# EAGLE board 5VAC-DC (EAGLE 9.6.2)
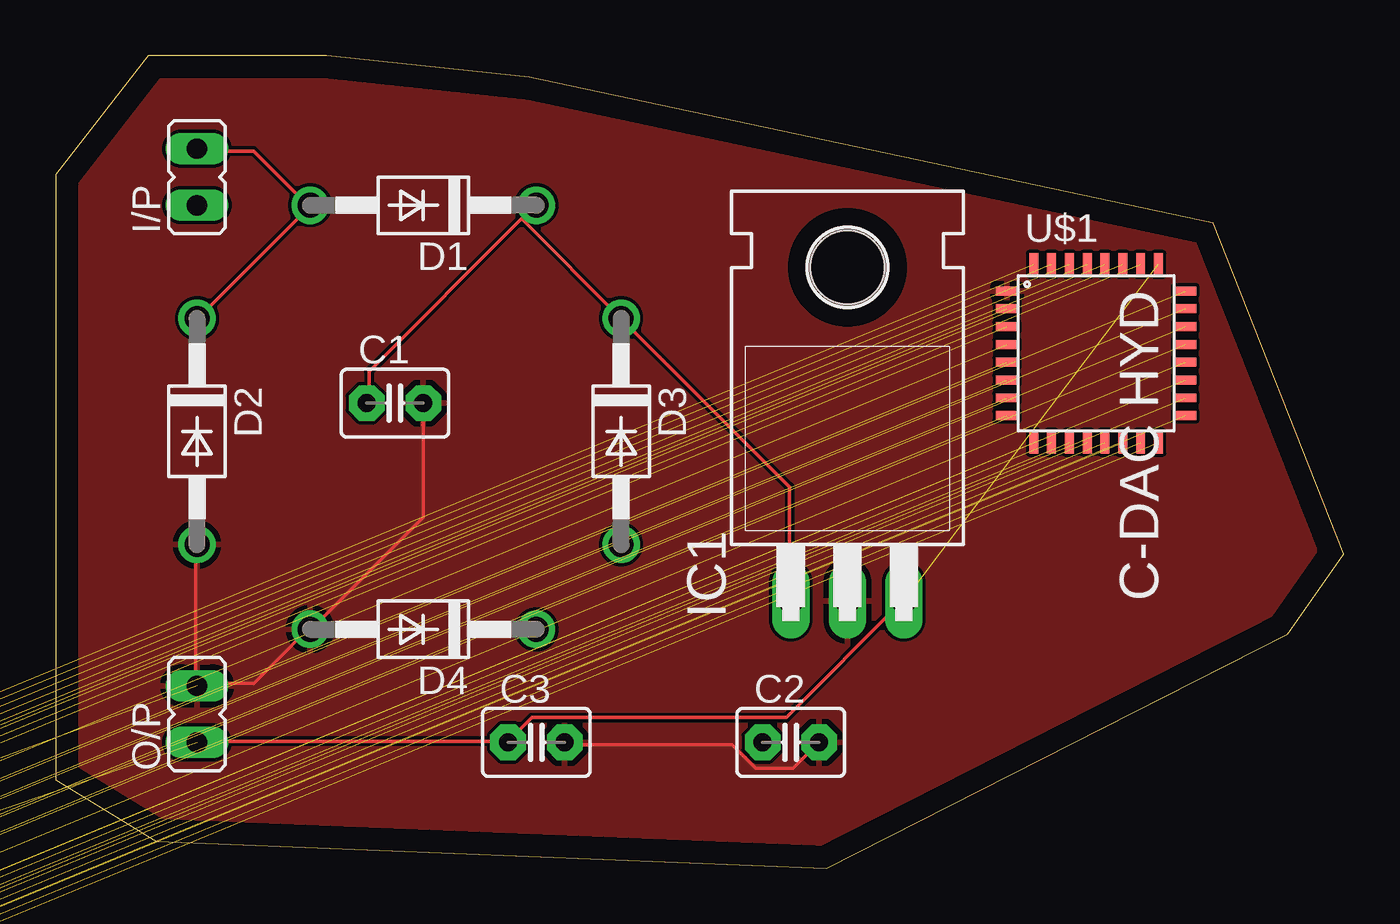
[diagram p0: board, top side]
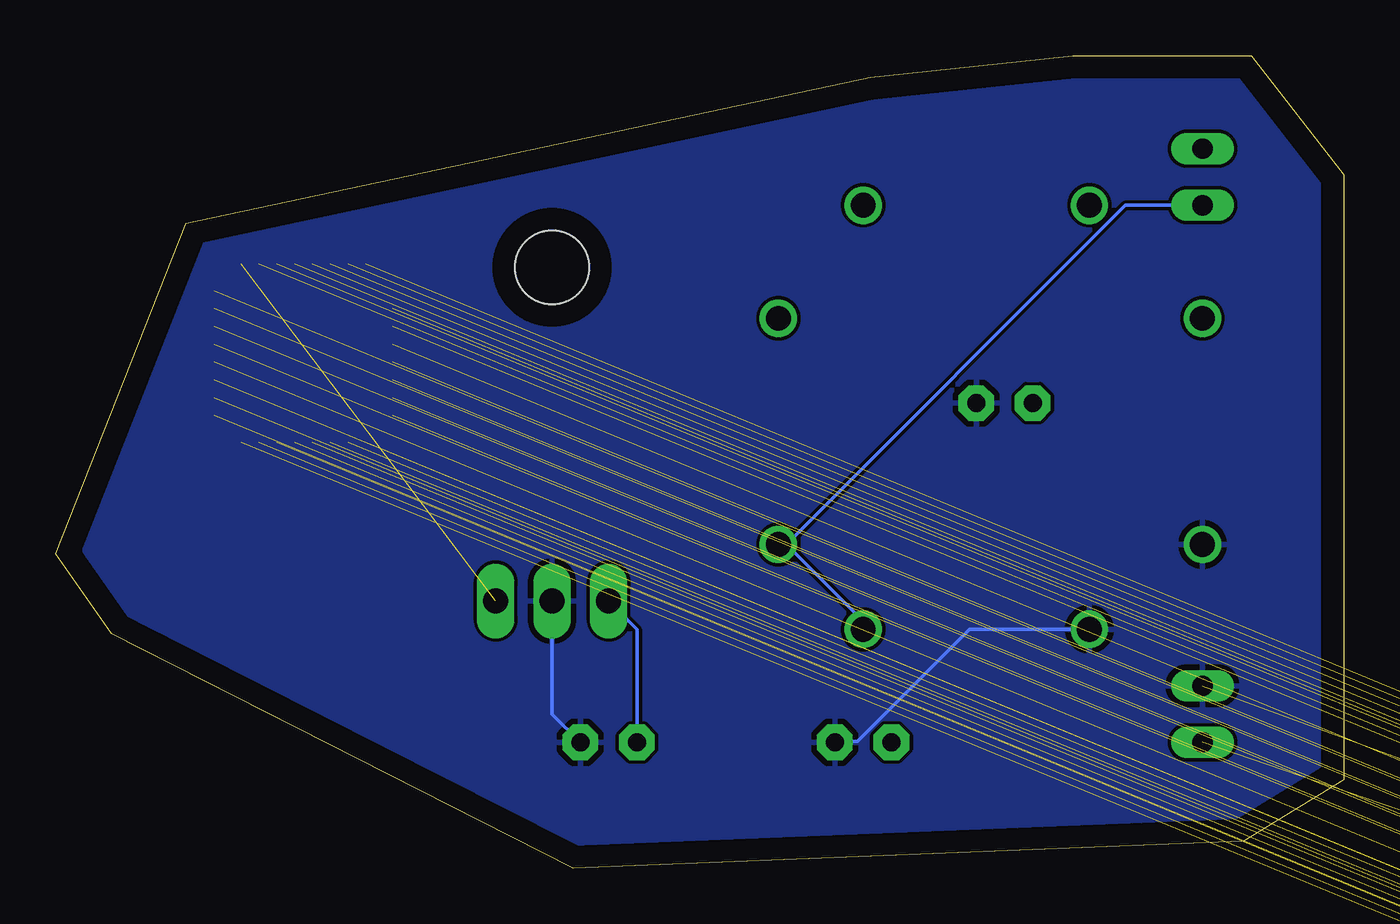
[diagram p1: board, bottom side, seen from below]

Size 57.86 x 36.51 mm. Coordinates in mm from the lower left corner, seen from the top.
Outline: 0,31.15 0,3.98 4.51,1.21 34.62,0 55.35,10.53 57.86,14.13 51.99,28.99 21.27,35.55 12.18,36.51 4.16,36.51 0,31.15
Copper layers (1*16): Top 0.035mm / dielectric 1.5mm / Bottom 0.035mm
Design rules "default": minimum track width 6mil, minimum drill 0.35mm, track to track 6mil, track to pad 6mil, pad to pad 6mil, via to via 6mil, smd to smd 6mil, copper to edge 40mil, drill to drill 6mil, minimum pad ring 10mil, minimum via ring 8mil, stop-mask expansion 4mil, vias tented up to drill 0mil, thermal gap 10mil

## Footprints (pad centres in the part's own frame; a part is rotated, then mirrored left to right if it is on the bottom)
C2.5-3 = drill 0.813 pad 1.6 octagon: 1 -1.27,0; 2 1.27,0
DO41-10 = drill 1.118: A 5.08,0; C -5.08,0
JP1 = drill 0.914 long: 1 0,-1.27; 2 0,1.27
TO220H = drill 1.118 long: 1 -2.54,-10.16; 2 0,-10.16; 3 2.54,-10.16 | hole 3.302: 0,4.826
TQFP-MEGA8L = smd 1 x 0.4: P$1 18.6,2.5; P$2 18.6,1.7; P$3 18.6,0.9; P$4 18.6,0.1; P$5 18.6,-0.7; P$6 18.6,-1.5; P$7 18.6,-2.3; P$8 18.6,-3.1; P$17 26.6,-3.1; P$18 26.6,-2.3; P$19 26.6,-1.5; P$20 26.6,-0.7; P$21 26.6,0.1; P$22 26.6,0.9; P$23 26.6,1.7; P$24 26.6,2.5 | smd 0.4 x 1: P$9 19.8,-4.3; P$10 20.6,-4.3; P$11 21.4,-4.3; P$12 22.2,-4.3; P$13 23,-4.3; P$14 23.8,-4.3; P$15 24.6,-4.3; P$16 25.4,-4.3; P$25 25.4,3.7; P$26 24.6,3.7; P$27 23.8,3.7; P$28 23,3.7; P$29 22.2,3.7; P$30 21.4,3.7; P$31 20.6,3.7; P$32 19.8,3.7

## Placement (x,y rotation side)
C1  1000uF  [C2.5-3]  15.24,20.9 0 top
C2  0.33uF  [C2.5-3]  33.02,5.66 0 top
C3  0.1uF  [C2.5-3]  21.59,5.66 0 top
D1  1N4004  [DO41-10]  16.51,29.79 180 top
D2  1N4004  [DO41-10]  6.35,19.63 270 top
D3  1N4004  [DO41-10]  25.4,19.63 270 top
D4  1N4004  [DO41-10]  16.51,10.74 180 top
I/P  12VAC  [JP1]  6.35,31.06 0 top
IC1  7805T  [TO220H]  35.56,22.17 0 top
O/P  5VDC  [JP1]  6.35,6.93 0 top
U$1  [TQFP-MEGA8L]  24.13,23.44 0 top
U$2  [TQFP-MEGA8L]  -71.12,-15.93 0 top  (outside the outline)

## Library data of the parts
C1-C3 = capacitor-wima
D1-D4 = diode
I/P O/P = jumper
IC1 = linear
U$1 U$2 = atmega8l

## Nets
GND: C1.2 C2.2 C3.2 D2.A D4.A IC1.2 O/P.2 U$1.P$1 U$2.P$1
N$1: D1.A D2.C I/P.2
N$2: U$1.P$2 U$2.P$2
N$3: U$1.P$3 U$2.P$3
N$4: C1.1 C2.1 D1.C D3.C IC1.1
N$5: C3.1 IC1.3 O/P.1 U$1.P$25 U$2.P$25
N$6: U$1.P$4 U$2.P$4
N$7: D3.A D4.C I/P.1
N$8: U$1.P$5 U$2.P$5
N$9: U$1.P$6 U$2.P$6
N$10: U$1.P$7 U$2.P$7
N$11: U$1.P$8 U$2.P$8
N$12: U$1.P$9 U$2.P$9
N$13: U$1.P$10 U$2.P$10
N$14: U$1.P$11 U$2.P$11
N$15: U$1.P$12 U$2.P$12
N$16: U$1.P$13 U$2.P$13
N$17: U$1.P$14 U$2.P$14
N$18: U$1.P$15 U$2.P$15
N$19: U$1.P$16 U$2.P$16
N$20: U$1.P$17 U$2.P$17
N$21: U$1.P$18 U$2.P$18
N$22: U$1.P$19 U$2.P$19
N$23: U$1.P$20 U$2.P$20
N$24: U$1.P$21 U$2.P$21
N$25: U$1.P$22 U$2.P$22
N$26: U$1.P$23 U$2.P$23
N$27: U$1.P$24 U$2.P$24
N$29: U$1.P$26 U$2.P$26
N$30: U$1.P$27 U$2.P$27
N$31: U$1.P$28 U$2.P$28
N$32: U$1.P$29 U$2.P$29
N$33: U$1.P$30 U$2.P$30
N$34: U$1.P$31 U$2.P$31
N$35: U$1.P$32 U$2.P$32

## Tracks (layer width: path | path; a pad name or v marks a point on that pad's centre or on a via)
GND  (1 unrouted)
  Top 0.152: C2.2 33.12,4.49 31.45,4.49 30.38,5.55 22.91,5.55 C3.2 | C1.2 16.51,15.77 11.48,10.74 D4.A 11.33,10.74 8.89,8.3 6.45,8.3 O/P.2 6.3,8.3 6.3,14.55 D2.A
  Bottom 0.152: IC1.2 35.56,6.93 C2.2 | D4.A 16.82,10.74 21.84,5.71 22.76,5.71 C3.2
  pour Top: -10.16,42.49 64.77,42.49 64.77,-18.47 -10.16,-18.47
  pour Bottom: -13.97,45.03 68.58,45.03 68.58,-23.55 -13.97,-23.55
N$1
  Top 0.152: I/P.2 6.45,32.22 8.89,32.22 11.33,29.79 D1.A 11.48,29.79 6.45,24.76 D2.C
N$2  (1 unrouted)
N$3  (1 unrouted)
N$4
  Top 0.152: 20.93,29.18 21.54,29.79 D1.C | 20.93,29.18 14.07,22.32 14.07,20.95 C1.1 | 20.93,29.18 D3.C 32.97,17.14 32.97,12.11 IC1.1
  Bottom 0.152: C2.1 31.75,10.74 IC1.1
N$5  (2 unrouted)
  Top 0.152: 20.32,5.71 6.45,5.71 O/P.1 | 20.32,5.71 21.39,6.77 32.82,6.77 38,11.96 IC1.3 | 20.32,5.71 C3.1
N$6  (1 unrouted)
N$7
  Bottom 0.152: I/P.1 9.8,29.79 25.04,14.55 | 25.04,14.55 D3.A 25.35,14.55 | 25.04,14.55 21.69,11.19 21.69,10.74 D4.C
N$8  (1 unrouted)
N$9  (1 unrouted)
N$10  (1 unrouted)
N$11  (1 unrouted)
N$12  (1 unrouted)
N$13  (1 unrouted)
N$14  (1 unrouted)
N$15  (1 unrouted)
N$16  (1 unrouted)
N$17  (1 unrouted)
N$18  (1 unrouted)
N$19  (1 unrouted)
N$20  (1 unrouted)
N$21  (1 unrouted)
N$22  (1 unrouted)
N$23  (1 unrouted)
N$24  (1 unrouted)
N$25  (1 unrouted)
N$26  (1 unrouted)
N$27  (1 unrouted)
N$29  (1 unrouted)
N$30  (1 unrouted)
N$31  (1 unrouted)
N$32  (1 unrouted)
N$33  (1 unrouted)
N$34  (1 unrouted)
N$35  (1 unrouted)

## Text on the board
tPlace: C-DAC HYD